# Altium PCB gY-950A20200704V1.PcbDoc (part 1 of 5)
Units mm, origin at the board's own origin, x right, y up, seen from the top; angles counter-clockwise.
Board outline 59.48 x 100.3 mm, 2 copper layers (Top Layer, Bottom Layer), stack 0.193 mm thick; 144 components, 124 nets, 550 pads, 234 vias.
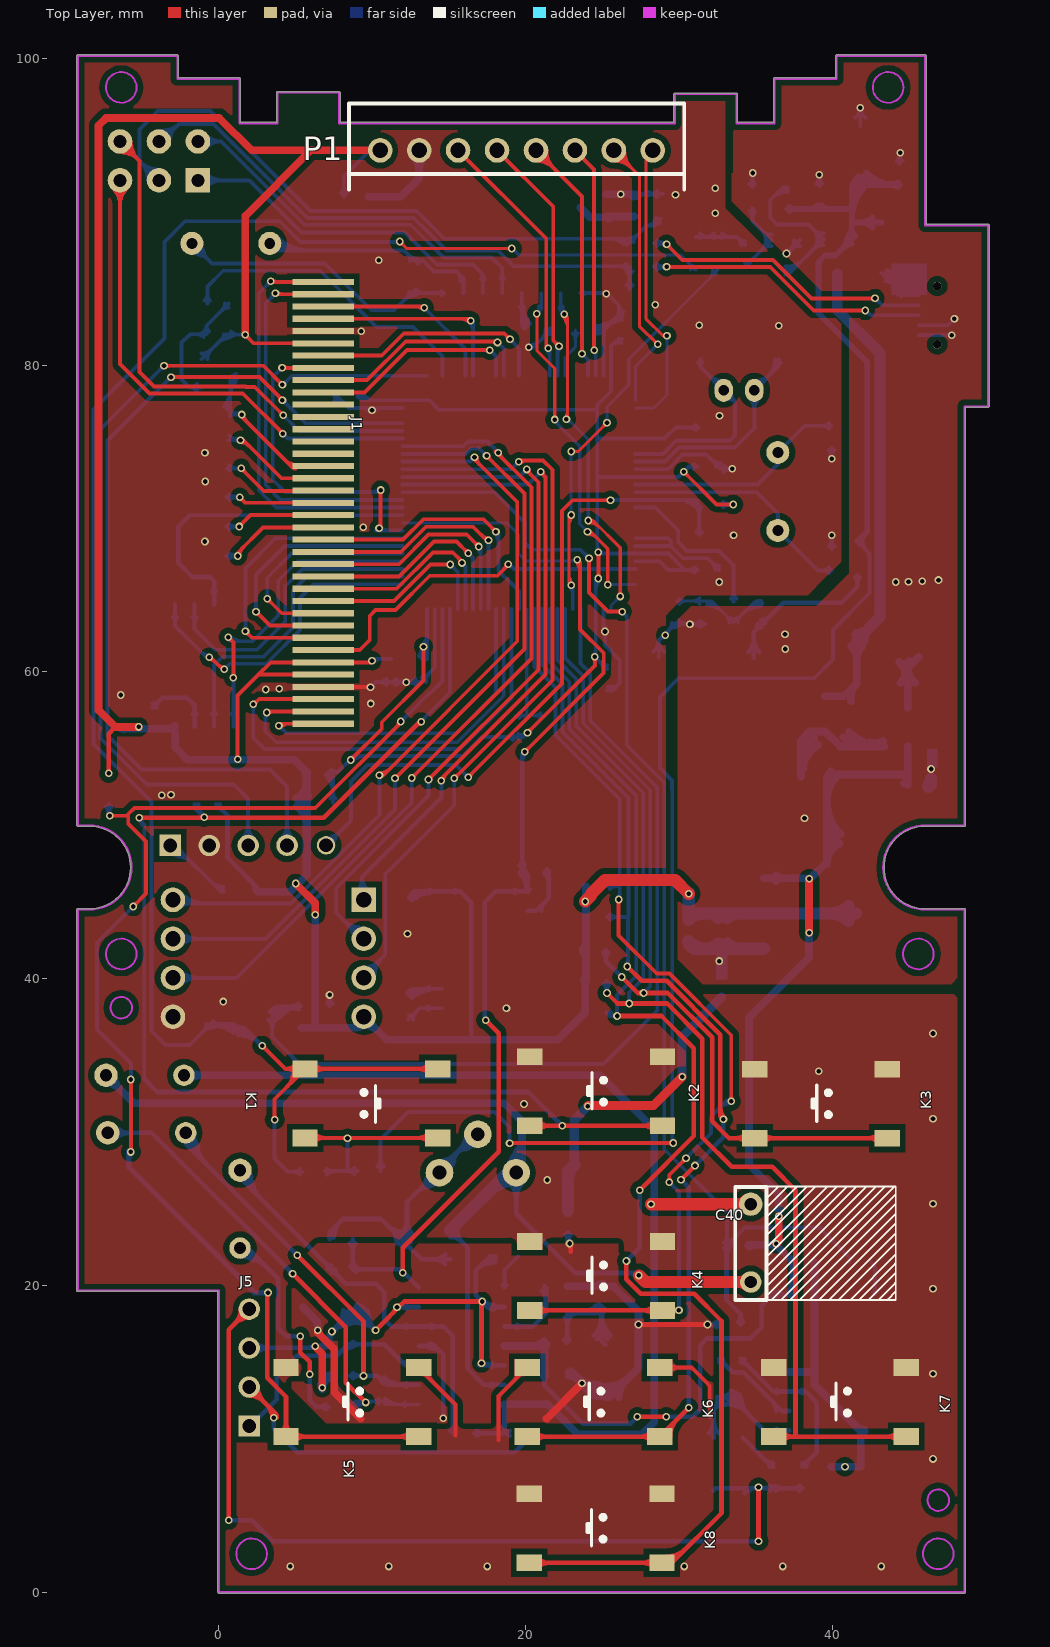
[diagram p0: Top Layer view]
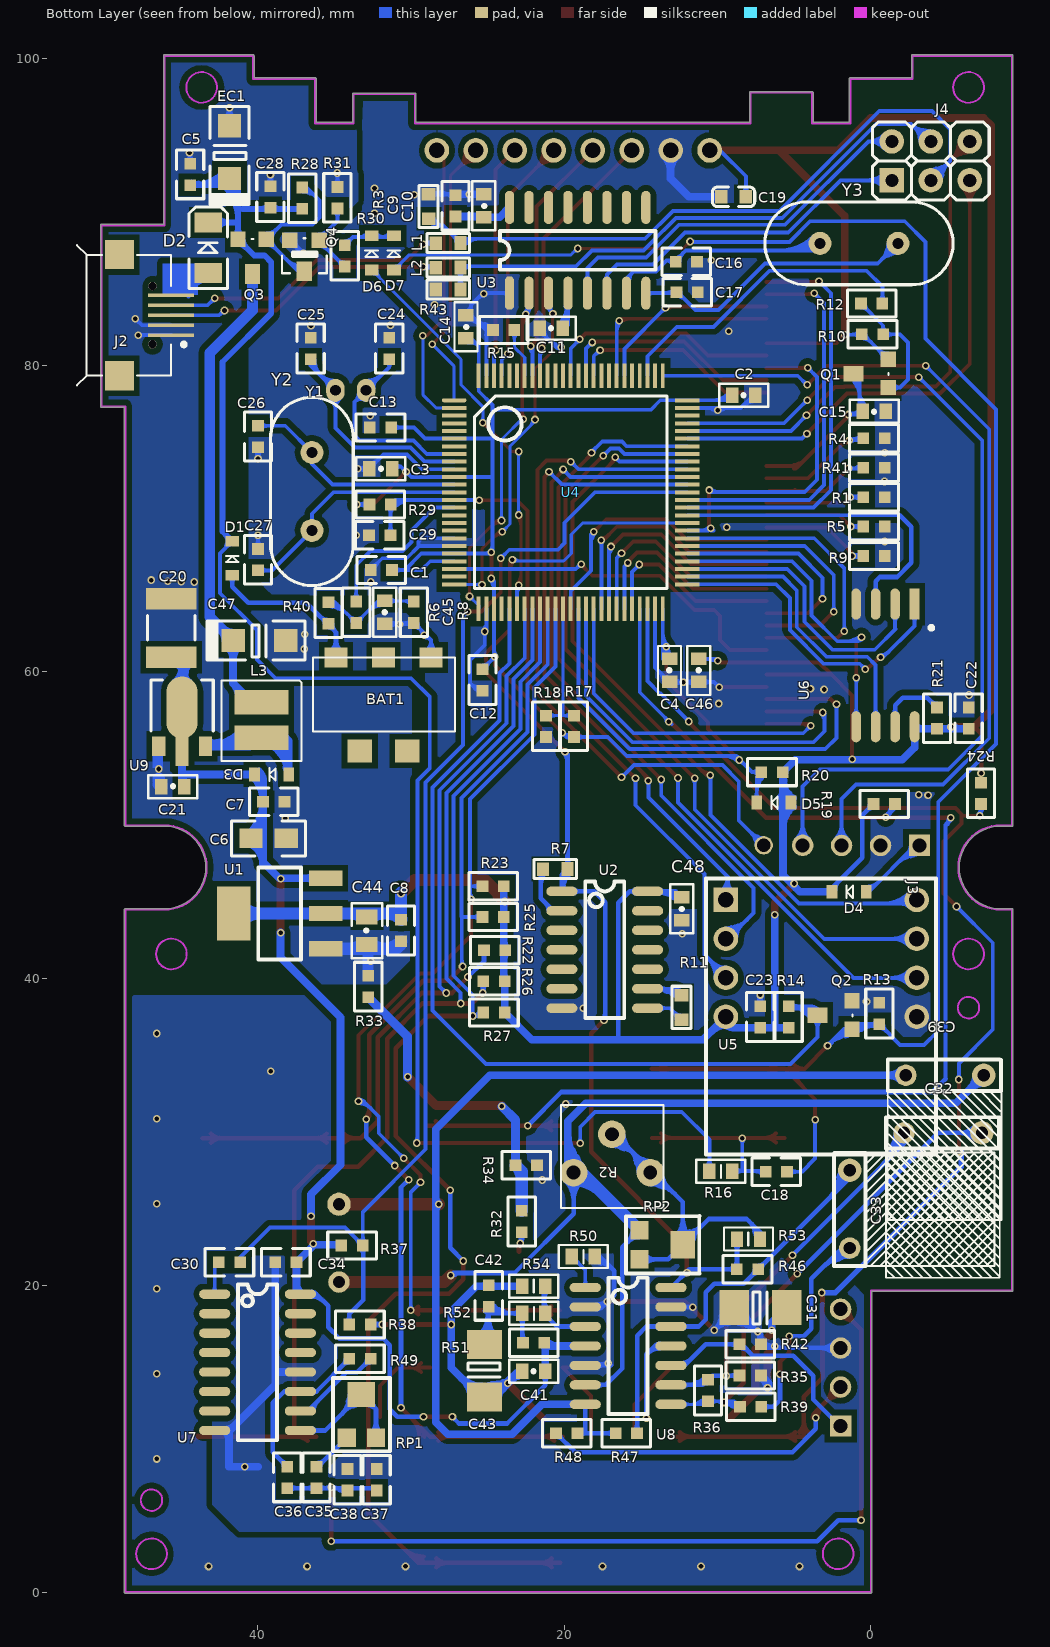
[diagram p1: Bottom Layer view, seen from below]

## Layer stack, top to bottom
Top Layer: signal copper 0.0419
Dielectric: core 0.1092, FR-4, Dk 4.2
Bottom Layer: signal copper 0.0419

## Board outline
-9.264,44.5 cw(c-9.2,44.5) -9.2,44.564 -8.45,44.564 ccw(c-8.45,47.25) -5.764,47.25 ccw(c-8.45,47.25) -8.449,49.936 cw(c-8.45,50) -8.45,49.936 -9.2,49.936 cw(c-9.2,50) -9.264,50 -9.264,100.169 cw(c-9.2,100.169) -9.2,100.233 -2.72,100.233 cw(c-2.72,100.169) -2.656,100.169 -2.656,98.733 1.33,98.733 cw(c1.33,98.669) 1.394,98.669 1.394,95.833 3.766,95.833 3.766,97.77 cw(c3.83,97.77) 3.83,97.834 7.83,97.834 cw(c7.83,97.77) 7.894,97.77 7.894,95.833 29.666,95.833 29.666,97.67 cw(c29.73,97.67) 29.73,97.734 33.73,97.734 cw(c33.73,97.67) 33.794,97.67 33.794,95.833 36.166,95.833 36.166,98.669 cw(c36.23,98.669) 36.23,98.733 40.216,98.733 40.216,100.169 cw(c40.28,100.169) 40.28,100.233 46.05,100.233 cw(c46.05,100.169) 46.114,100.169 46.114,89.184 50.15,89.184 cw(c50.15,89.12) 50.214,89.12 50.214,77.32 cw(c50.15,77.32) 50.15,77.256 48.664,77.256 48.664,50 cw(c48.6,50) 48.6,49.936 46.05,49.936 cw(c46.05,50) 46.049,49.936 cw(c46.05,47.25) 46.05,49.936 46.049,49.936 ccw(c46.05,47.25) 46.05,44.564 48.6,44.564 cw(c48.6,44.5) 48.664,44.5 48.664,0 ccw(c48.6,0) 48.664,0.001 48.664,0 cw(c48.6,0) 48.599,-0.064 0,-0.064 cw(c0,0) -0.064,0 -0.064,19.607 -9.2,19.607 cw(c-9.2,19.671) -9.264,19.671

## Design rules (kind name [scope] priority, off if disabled: settings)
Clearance Clearance_1 [IsRegion] p1: gap=0.381
Clearance [All] p2: gap=0.203
ComponentClearance [All] p1 off: gap=0.254 collisioncheckmode=3 verticalgap=0.254 showdistances=FALSE
HoleSize [All] p1: absolutevalues=TRUE maxlimit=7.62 minlimit=0.025 maxpercent=80.000 minpercent=20.000
HoleToHoleClearance [All] p1 off: gap=0.051 allowstackedmicrovias=TRUE
MinimumSolderMaskSliver [All] p1 off: minsoldermaskwidth=0.025
PolygonConnect [All] p1: connectstyle=Direct reliefconductorwidth=0.254 reliefentries=4 polygonreliefangle="90 Angle"
RoutingVias [All] p1: holewidth=0.508 width=0.762 viastyle="Through Hole" minholewidth=0.381 minwidth=0.508 maxholewidth=0.889 maxwidth=1.27
SilkToSilkClearance [All] p1: silktosilkclearance=0.013
SilkscreenOverComponentPads SilkToSolderMaskClearance [IsPad] p1 off: minsilkscreentomaskgap=0.03
SolderMaskExpansion [All] p1: expansion=0.102
Width [All] p1: maxlimit=7.62 minlimit=0.203 preferedwidth=0.254
22 further rules are at their usual default settings.

## Components (designator, comment, footprint, x,y, rotation, side; value= is the part's Value field where it differs from the comment)
BAT1 "BL-5C" BC-4-3P 36.373,60.935 r180 bottom locked
C1 "100nF" 0603C#1 31.217,66.65 r0 bottom
C2 "100nF" 0603C#2 9.042,78.029 r180 bottom
C3 "100nF" 0603C#2 31.191,73.254 r0 bottom
C4 "100nF" 0603C#2 13.132,60.858 r270 bottom
C5 "100nF" 0603C#1 44.38,91.74 r90 bottom
C6 "106" 0805C#1 38.125,49.149 r0 bottom
C7 "104" 0603C#1 38.227,51.537 r0 bottom
C8 "104" 0603C#1 30.632,42.443 r90 bottom
C9 "106" 0603C#1 27.076,89.687 r90 bottom
C10 "104" 0603C#2 25.222,89.637 r90 bottom
C11 "104" 0603C#2 21.59,82.398 r180 bottom
C12 "100nF" 0603C#1 25.324,60.173 r270 bottom
C13 "100nF" 0603C#1 31.274,75.941 r0 bottom
C14 "100nF" 0603C#2 26.391,81.737 r90 bottom
C15 "100nF" 0603C#2 0.54,76.983 r180 bottom
C16 "22PF" 0603C#1 12.675,84.76 r180 bottom
C17 "22PF" 0603C#1 11.328,86.741 r0 bottom
C18 "100nF" 0603C#1 6.858,27.407 r180 bottom
C19 "104" C_0603 8.947,90.978 r0 bottom
C20 "107/16V" 1812 45.898,62.916 r90 bottom
C21 "100nF" 0603C#2 44.755,52.527 r0 bottom
C22 "100nF" 0603C#1 -6.375,57.683 r270 bottom
C23 "104" 0603C#1 7.214,38.202 r270 bottom
C24 "13pF" 0603C#1 31.394,81.788 r270 bottom (schematic designator C45)
C25 "13pF" 0603C#1 36.525,81.788 r270 bottom
C26 "13pF" 0603C#1 39.952,74.651 r90 bottom
C27 "13pF" 0603C#1 39.954,68.021 r270 bottom
C28 "100nF" 0603C#1 39.148,91.664 r270 bottom
C29 "100nF" 0603C#1 32.715,68.91 r180 bottom
C30 "474pF" 0603C#1 41.123,21.514 r0 bottom
C31 "106/16V" 3528B 7.061,18.644 r90 bottom
C32 "683" CBB_5*5 -4.724,29.896 r90 bottom locked
C33 "224" CBB_5*5 1.321,24.994 r0 bottom locked
C34 "100nF" 0603C#1 37.44,21.514 r0 bottom
C35 "1nF" 0603C#1 36.144,6.782 r90 bottom
C36 "2.7pF" 0603C#1 38.043,6.782 r90 bottom
C37 "13pF" 0603C#1 32.22,6.629 r90 bottom
C38 "82pF" 0603C#1 34.119,6.629 r90 bottom
C39 "334" CBB_5*5 -4.844,33.65 r90 bottom locked
C40 "272" CBB_5*5 34.729,22.779 r180 top locked
C41 "100nF" 0603C#2 22.733,14.402 r180 bottom
C42 "100nF" 0603C#1 24.917,20.015 r270 bottom
C43 "47uF/16v" 3528B 25.095,14.3 r180 bottom
C44 "106" 0805C#2 32.842,42.215 r90 bottom
C45 "100nF" 0603C#2 31.699,64.643 r270 bottom
C46 "100nF" 0603C#2 11.227,60.858 r270 bottom
C47 "106/16V" 1206C-T 41.58,62.052 r180 bottom
C48 "104" 0603C#2 12.319,43.79 r90 bottom
D1 "B5819WS" SOD-323_B5819WS 41.631,67.412 r90 bottom
D2 "IN4148" DIODE0 43.205,86.004 r90 bottom
D3 "SS14" SOD-323_B5819WS 39.065,53.315 r0 bottom
D4 "B5819ws" SOD-323_B5819WS 1.42,45.669 r0 bottom
D5 "B5819WS" SOD-323_B5819WS 6.325,51.486 r0 bottom
D6 "B5819ws" SOD-323_B5819WS 32.544,87.32 r90 bottom
D7 "B5819ws" SOD-323_B5819WS 31.096,87.32 r90 bottom
EC1 "10uF/10V" 1206C-T 41.815,92.172 r90 bottom
J1 "TFT2.4_37P-0.8MM" TFT2.4_37P-0.8 6.807,74.625 r0 top locked
J2 "Micro USB" Micro_USB 51.137,83.256 r0 bottom locked
J3 "DEBUG" HEADER5-2.54 1.905,48.692 r0 bottom
J4 "CONT3*2" SIP3*2_2MM54 -1.372,92.05 r90 bottom locked
J5 "sensor" HEADER4-2.54 3.404,18.161 r90 top
K1 "BUTTON" key_6*6*5mm 9.939,31.872 r270 top locked
K2 "BUTTON" key_6*6*5mm 24.595,32.66 r90 top locked
K3 "BUTTON" key_6*6*5mm 39.251,31.847 r90 top locked
K4 "BUTTON" key_6*6*5mm 24.595,20.62 r90 top locked
K5 "BUTTON" key_6*6*5mm 8.694,12.393 r90 top locked
K6 "BUTTON" key_6*6*5mm 24.417,12.393 r90 top locked
K7 "BUTTON" key_6*6*5mm 40.495,12.393 r90 top locked
K8 "BUTTON" key_6*6*5mm 24.562,4.166 r90 top locked
L1 "10R" R_0603 27.559,87.96 r0 bottom
L2 "10R" R_0603 27.559,86.36 r0 bottom
L3 "10uH" "CD32 - duplicate" 39.726,58.014 r270 bottom
P1 "Header 8" 2.54-8PH 10.516,94.005 r0 top locked
Q1 "AO3401" SOT-23_A03401A_PMOS -0.629,79.142 r0 bottom
Q2 "9013" SOT-23_S9013_J3_NPN 2.108,37.694 r0 bottom
Q3 "AO3401" SOT-23_A03401A_PMOS 40.011,87.701 r270 bottom
Q4 "9013" SOT-23 37.877,88.151 r180 bottom
R1 "1.5K" 0603R#1 -0.908,71.395 r0 bottom
R2 "RP2" R_SW 19.38,27.356 r180 bottom
R3 "NC300k" R_0603 28.829,90.348 r270 bottom
R4 "1.5K" 0603R#1 -0.908,75.23 r0 bottom
R5 "1.5K" 0603R#1 -0.908,69.477 r0 bottom
R6 "1K" 0603R#1 33.553,64.592 r270 bottom
R7 "0R" R_0603 20.574,47.142 r0 bottom
R8 "1M" 0603R#1 29.794,63.195 r90 bottom
R9 "oR" 0603R#1 -0.908,67.559 r0 bottom
R10 "100K" 0603R#1 0.591,82.012 r180 bottom
R11 "0R" R_0603 12.344,38.125 r90 bottom
R12 "1K" 0603R#1 -0.756,84.018 r0 bottom
R13 "100k" 0603R#1 -0.559,38.43 r270 bottom
R14 "300k" 0603R#1 5.359,36.805 r90 bottom
R15 "100K" 0603R#1 23.241,82.296 r0 bottom
R16 "20k" 0603R#2 9.017,27.457 r0 bottom
R17 "100K" 0603R#1 19.355,55.753 r90 bottom
R18 "100K" 0603R#1 21.184,55.753 r90 bottom
R19 "100k" 0603R#1 -0.178,51.384 r180 bottom
R20 "0R" 0603R#1 5.74,53.467 r0 bottom
R21 "10K" 0603R#1 -4.318,57.683 r270 bottom
R22 "100k" 0603R#1 23.825,41.859 r0 bottom
R23 "100k" 0603R#1 23.927,46.025 r0 bottom
R24 "100k" 0603R#1 -7.188,52.781 r270 bottom
R25 "100k" 0603R#1 23.927,44.018 r0 bottom
R26 "100k" 0603R#1 23.876,39.827 r0 bottom
R27 "100K" 0603R#1 23.876,37.795 r0 bottom
R28 "300K" 0603R#1 37.065,91.588 r270 bottom
R29 "10K" 0603R#1 31.293,70.917 r0 bottom
R30 "10K" 0603R#1 34.296,86.431 r90 bottom
R31 "300K" 0603R#1 34.779,91.613 r270 bottom
R32 "0R" 0603R#1 22.758,23.47 r90 bottom
R33 "0R" 0603R#1 32.766,38.786 r90 bottom
R34 "0R" 0603R#1 21.768,27.838 r0 bottom
R35 "680R 1%" 0603R#1 8.56,14.122 r180 bottom
R36 "120K 1%" 0603R#1 10.617,12.446 r90 bottom
R37 "360k" 0603R#1 33.122,22.606 r0 bottom
R38 "180K" 0603R#1 34.011,17.45 r180 bottom
R39 "47K 1%" 0603R#1 7.137,12.09 r0 bottom
R40 "1M" 0603R#1 35.357,64.541 r270 bottom
R41 "1.5K" 0603R#1 -0.908,73.312 r0 bottom
R42 "180K 1%" 0603R#1 8.56,16.154 r180 bottom
R43 "NC300K" R_0603 27.559,84.938 r0 bottom
R46 "180K 1%" 0603R#1 7.341,21.057 r0 bottom
R47 "120K 1%" 0603R#1 16.637,10.363 r180 bottom
R48 "390R 1%" 0603R#1 20.523,10.363 r180 bottom
R49 "1M 1%" 0603R#1 32.614,15.215 r0 bottom
R50 "100R 1%" 0603R#2 17.983,21.895 r0 bottom
R51 "100R 1%" 0603R#1 21.285,16.256 r0 bottom
R52 "30K 1%" 0603R#2 21.209,18.186 r0 bottom
R53 "10K 1%" 0603R#2 8.738,23.012 r180 bottom
R54 "20K 1%" 0603R#2 22.733,19.939 r180 bottom
RP1 "30K" RP3*3 33.274,12.852 r270 bottom
RP2 "20k" RP3*3 12.294,22.708 r0 bottom
U1 "AMS1117-3.3V" SOT_223 38.542,44.25 r180 bottom
U2 "74HC14D" TLC27M91 17.348,41.883 r180 bottom
U3 "CH340G" SO-16 23.546,84.684 r90 bottom
U4 "STM32F103VCT6" LQFP100 28.169,79.35 r270 bottom locked
U5 "SNR012V" SNR012V 9.449,45.136 r180 bottom locked
U6 "W25Q64" 24LC512 -1.219,60.325 r90 bottom
U7 "74HC4060D" 74HC4060D 38.075,14.749 r180 bottom
U8 "TLC27M91" TLC27M91 15.824,16.053 r180 bottom
U9 "MC2688-5V" SOT-89 46.431,55.143 r180 bottom
Y1 "32.768KHz" 32768 33.909,78.359 r270 bottom
Y2 "12M" XTAL 36.449,69.24 r270 bottom
Y3 "12M" XTAL -1.753,87.935 r180 bottom

## Footprints (in the part's own frame and the unit in brackets; to place one, negate y for a bottom-side part, rotate by r counter-clockwise, add the part's x,y. Pads: shape width x height; smd on the part's side, far side on the other; paste and mask are expansions set on the pad)
2.54-8PH [mm]
  round 1.6 hole 1: 1(-0.004,-0.001) 2(2.536,-0.001) 3(5.076,-0.001) 4(7.616,-0.001) 5(10.156,-0.001) 6(12.696,-0.001) 7(15.236,-0.001) 8(17.776,-0.001)
  silkscreen extent -2.03,-2.55 19.82,3.06
24LC512 [mil]
  rect 80x25 smd: 1(161.35,-64.4)
  oval 80x25 smd: 2(161.35,-14.4) 3(161.35,35.6) 4(161.35,85.6) 5(-153.62,85.6) 6(-153.61,35.6) 7(-153.62,-14.4) 8(-153.62,-64.4)
  silkscreen extent 96,-112 105,-102
74HC4060D [mil]
  oval 80x24 smd: 1(-185.28,184.33) 2(-185.28,134.33) 3(-185.28,84.33) 4(-185.28,34.33) 5(-185.28,-15.67) 6(-185.28,-65.67) 7(-185.28,-115.67) 8(-185.28,-165.67) 9(34.72,-165.67) 10(34.72,-115.67) 11(34.72,-65.67) 12(34.72,-15.67) 13(34.72,34.33) 14(34.72,84.33) 15(34.72,134.33) 16(34.72,184.33)
  silkscreen extent -125,-191 -25,209
0603C#1 [mil]
  rect 30x30 smd: 1(0.04,0.04) 2(55.04,0.04)
  silkscreen extent -35,-35 90,35
0603C#2 [mil]
  rect 32x40 smd: 1(0.5,0.34) 2(59.5,0.34)
  silkscreen extent -33,-29 93,30
0603R#1 [mil]
  rect 30x30 smd: 1(0,0) 2(55,0)
  silkscreen extent -35,-35 90,35
0603R#2 [mil]
  rect 32x40 smd: 1(0.5,0.34) 2(59.5,0.34)
  silkscreen extent -33,-29 93,30
0805C#1 [mil]
  rect 60x50 smd: 1(0,-0.04) 2(90,-0.04)
  silkscreen extent -50,-45 140,45
0805C#2 [mil]
  rect 39.37x55.12 smd: 1(0.38,0.46) 2(71.24,0.46)
  silkscreen extent -35,-39 107,40
1206C-T [mil]
  rect 60x60 smd: 1(-0.04,-0.04) 2(134.96,-0.04)
  silkscreen extent -67,-50 185,50
1812 [mm]
  rect 1.4x3.3 smd: 1(-1.948,-0.282) 2(1.852,-0.282)
  silkscreen extent -0.85,-1.83 0.75,1.27, body extent -2.45,-1.98 2.35,1.42, height 1.4
3528B [mm]
  rect 2.28x1.9 smd: 1(-0.082,1.839) 2(-0.082,-1.581)
  silkscreen extent -1.16,-0.28 0.93,0.63
32768 [mm]
  rect 6x2 on Bottom Overlay: 0(-4.5,0)
  oval 1.5x1.2 hole 0.7: 1(0,1) 2(0,-1)
BC-4-3P [mm] "H=7.7"
  rect 1.6x1.5 smd: 0(3.05,-6.1) 0(6.15,-6.1)
  rect 1.5x1.3 smd: 0(4.6,0) 1(1.5,0) 2(7.7,0)
  silkscreen extent 0,-4.83 9.27,0
C_0603 [mm]
  rect 0.8x0.9 smd: 1(-0.8,0) 2(0.8,0)
  silkscreen extent -1.38,-0.64 1.38,0.64, body extent -0.85,-0.39 0.75,0.41, height 0.8
CBB_5*5 [mm]
  round 1.524 hole 0.8: 1(0.052,-2.52)
  round 1.4 hole 0.8: 2(0.052,2.56)
  silkscreen extent -9.4,-3.68 1.07,3.75
"CD32 - duplicate" [mm]
  rect 1.6x3.5 smd: 1(0,0) 2(2.3,0)
  silkscreen extent -1.41,-2.62 3.83,2.6
DIODE0 [mm]
  rect 1.3x1.8 smd: A(0,0) K(3.3,0)
  silkscreen extent -1.01,-1.26 4.3,1.25
HEADER4-2.54 [mm]
  rect 1.4x1.4 hole 0.9: 1(-7.328,1.433)
  round 1.4 hole 0.9: 2(-4.788,1.433) 3(-2.248,1.433) 4(0.292,1.429)
HEADER5-2.54 [mm]
  rect 1.4x1.4 hole 0.9: 1(-5.08,0.004)
  round 1.4 hole 0.9: 2(-2.54,0.004) 3(0,0.004) 4(2.54,0)
  round 1.2 hole 0.9: 5(5.08,-0.004)
key_6*6*5mm [mm]
  rect 1.1x1.65 smd: 1(-2.25,4.325) 2(-2.25,-4.325) 3(2.25,-4.325) 4(2.25,4.325)
  silkscreen extent -1.15,-0.62 1.23,0.57
LQFP100 [mm]
  oval 0.26x1.6 smd: 1(1.637,1.002)
  rect 0.26x1.6 smd: 2(2.137,1.002) 3(2.637,1.002) 4(3.137,1.002) 5(3.637,1.002) 6(4.137,1.002) 7(4.637,1.002) 8(5.137,1.002) 9(5.637,1.002) 10(6.137,1.002) 11(6.637,1.002) 12(7.137,1.002) 13(7.637,1.002) 14(8.137,1.002) 15(8.637,1.002) 16(9.137,1.002) 17(9.637,1.002) 18(10.137,1.002) 19(10.637,1.002) 20(11.137,1.002) 21(11.637,1.002) 22(12.137,1.002) 23(12.637,1.002) 24(13.137,1.002) 25(13.637,1.002) 51(13.637,16.202) 52(13.137,16.202) 53(12.637,16.202) 54(12.137,16.202) 55(11.637,16.202) 56(11.137,16.202) 57(10.637,16.202) 58(10.137,16.202) 59(9.637,16.202) 60(9.137,16.202) 61(8.637,16.202) 62(8.137,16.202) 63(7.637,16.202) 64(7.137,16.202) 65(6.637,16.202) 66(6.137,16.202) 67(5.637,16.202) 68(5.137,16.202) 69(4.637,16.202) 70(4.137,16.202) 71(3.637,16.202) 72(3.137,16.202) 73(2.637,16.202) 74(2.137,16.202) 75(1.637,16.202)
  rect 1.6x0.26 smd: 26(15.237,2.602) 27(15.237,3.102) 28(15.237,3.602) 29(15.237,4.102) 30(15.237,4.602) 31(15.237,5.102) 32(15.237,5.602) 33(15.237,6.102) 34(15.237,6.602) 35(15.237,7.102) 36(15.237,7.602) 37(15.237,8.102) 38(15.237,8.602) 39(15.237,9.102) 40(15.237,9.602) 41(15.237,10.102) 42(15.237,10.602) 43(15.237,11.102) 44(15.237,11.602) 45(15.237,12.102) 46(15.237,12.602) 47(15.237,13.102) 48(15.237,13.602) 49(15.237,14.102) 50(15.237,14.602) 76(0.037,14.602) 77(0.037,14.102) 78(0.037,13.602) 79(0.037,13.102) 80(0.037,12.602) 81(0.037,12.102) 82(0.037,11.602) 83(0.037,11.102) 84(0.037,10.602) 85(0.037,10.102) 86(0.037,9.602) 87(0.037,9.102) 88(0.037,8.602) 89(0.037,8.102) 90(0.037,7.602) 91(0.037,7.102) 92(0.037,6.602) 93(0.037,6.102) 94(0.037,5.602) 95(0.037,5.102) 96(0.037,4.602) 97(0.037,4.102) 98(0.037,3.602) 99(0.037,3.102) 100(0.037,2.602)
  silkscreen extent 1.37,2.34 13.9,14.87
Micro_USB [mm] "5P ÌùÆ¬ ´"
  rect 3x0.25 smd: 1(-5.508,1.3) 2(-5.508,0.65) 3(-5.508,0) 4(-5.508,-0.65) 5(-5.508,-1.3)
  round 0.55 hole 0.55 unplated: MH1(-4.3,1.9) MH2(-4.3,-1.9)
  rect 1.9x1.9 smd: ""(-2.15,-3.95) ""(-2.15,3.95)
  silkscreen extent -6.47,-4.57 0.63,4.57
R_0603 [mm]
  rect 0.8x0.9 smd: 1(-0.8,-0.006) 2(0.8,0.006)
  silkscreen extent -1.38,-0.62 1.38,0.61, body extent -0.76,-0.38 0.84,0.42, height 0.45
R_SW [mm]
  round 1.8 hole 0.9: 1(0,0) 2(5,0) 3(2.5,2.5)
  silkscreen extent -0.83,-2.3 5.87,4.4
RP3*3 [mm]
  rect 1.2x1.2 smd: 1(2.791,-0.893) 2(2.791,1.012)
  rect 1.6x1.8 smd: 3(-0.035,0.056)
  silkscreen extent -1.11,-1.81 3.67,1.92
SIP3*2_2MM54 [mm]
  rect 1.6x1.6 hole 0.85: 1(0,0)
  round 1.6 hole 0.85: 2(2.54,0) 3(0,-2.54) 4(2.54,-2.54) 5(0,-5.08) 6(2.54,-5.08)
  silkscreen extent -1.27,-6.35 3.81,1.27, body extent -1.27,-6.35 3.81,1.28, height 8.54
SNR012V [mm]
  rect 1.6x1.6 hole 1: 1(0,0)
  round 1.6 hole 1: 2(0,-2.54) 3(0,-5.08) 4(0,-7.62) 5(12.446,-7.62) 6(12.446,-5.08) 7(12.446,-2.54) 8(12.446,0)
  silkscreen extent -1.31,-16.6 13.69,1.4
SO-16 [mil]
  oct 85x24 smd: 1(0.5,0.34)
  oval 85x24 smd: 2(0.5,-49.66) 3(0.5,-99.66) 4(0.5,-149.66) 5(0.5,-199.66) 6(0.5,-249.66) 7(0.5,-299.66) 8(0.5,-349.66) 9(220.5,-349.66) 10(220.5,-299.66) 11(220.5,-249.66) 12(220.5,-199.66) 13(220.5,-149.66) 14(220.5,-99.66) 15(220.5,-49.66) 16(220.5,0.34)
  silkscreen extent 60,-375 160,25, body extent -46,-377 266,25, height 71
SOD-323_B5819WS [mm]
  rect 0.7x0.9 smd: 1(-1.115,0) 2(1.115,0)
  silkscreen extent -0.25,-0.41 0.15,0.43
SOT-23 [mm]
  rect 1x1 smd: B(1.905,0) E(0,0)
  rect 1x1.27 smd: C(0.94,-2.032)
  silkscreen extent -0.51,-2.16 2.41,0.13, body extent -0.54,-2.57 2.46,0.43, height 1.3
SOT-23_A03401A_PMOS [mm]
  rect 1.3x1 smd: D(1.75,-0.304)
  rect 1x1 smd: G(-0.5,0.6) S(-0.5,-1.244)
  silkscreen extent -0.53,-0.35 -0.53,-0.23
SOT-23_S9013_J3_NPN [mm]
  rect 1x1 smd: B(-0.881,0.981) E(-0.881,-0.863)
  rect 1.3x1 smd: C(1.369,0.077)
  silkscreen extent -0.91,0.03 -0.91,0.15
SOT-89 [mil]
  rect 34x50 smd: 1(0,0) 3(120,0)
  rect 34x100 smd: 2(60,0)
  oval 79.65x160 smd: 2(60,100)
  silkscreen extent -20,40 140,170
SOT_223 [mm]
  rect 2.2x1 smd: 1(3,-2.3) 2(3,0) 3(3,2.3)
  rect 2.2x3.5 smd: 2(-3,0)
  silkscreen extent -1.4,-3 1.4,3, body extent -3.49,-3.25 3.47,3.25, height 1.7
TFT2.4_37P-0.8 [mm]
  rect 4x0.4 smd: 1(0,10.8) 2(0,10) 3(0,9.2) 4(0,8.4) 5(0,7.6) 6(0,6.8) 7(0,6) 8(0,5.2) 9(0,4.4) 10(0,3.6) 11(0,2.8) 12(0,2) 13(0,1.2) 14(0,0.4) 15(0,-0.4) 16(0,-1.2) 17(0,-2) 18(0,-2.8) 19(0,-3.6) 20(0,-4.4) 21(0,-5.2) 22(0,-6) 23(0,-6.8) 24(0,-7.6) 25(0,-8.4) 26(0,-9.2) 27(0,-10) 28(0,-10.8) 29(0,-11.6) 30(0,-12.4) 31(0,-13.2) 32(0,-14) 33(0,-14.8) 34(0,-15.6) 35(0,-16.4) 36(0,-17.2) 37(0,-18)
TLC27M91 [mil]
  oval 80x24 smd: 1(-110,150) 2(-110,100) 3(-110,50) 4(-110,0) 5(-110,-50) 6(-110,-100) 7(-110,-150) 8(110,-150) 9(110,-100) 10(110,-50) 11(110,0) 12(110,50) 13(110,100) 14(110,150)
  silkscreen extent -50,-175 50,175
XTAL [mm]
  round 1.5 hole 0.711: 1(0.013,0.009) 2(-5.067,0.009)
  round 1.8 on Bottom Overlay: 1(0.013,0.009) 2(-5.067,0.009)
  round 1.8 on Top Solder: 1(0.013,0.009) 2(-5.067,0.009)
  round 0.889 on Bottom Solder: 175(0.013,0.009) 176(-5.067,0.009)
  silkscreen extent -8.66,-2.69 3.61,2.71

## Part data
BAT1: library part "Plug AC Female", "IEC Mains Power Outlet, EN60 320-2-2 F Class I, PC Flange Rear Mount, Chassis Socket"
C1 C2 C3 C4 C5 C12 C13 C14 C15 C18 C22 C24 C25 C26 C27 C28 C29 C30 C32 C33 C34 C35 C36 C37 C38 C39 C40 C41 C42 C45 C46: library part CAP, "Capacitor"
C6 C7 C8 C9 C10 C11 C16 C17 C23 C44 C48: library part CAP3
C19: library part CAP
C20 C21: library part CAP-TYPE1
C31 C43 C47: library part ELECTRO1, "Electrolytic Capacitor"
D1 D2 D4 D5: library part DIODE, "Diode"
D3 D6 D7: library part "Diode 11DQ03", "Schottky Rectifier"
EC1: library part ECAP, "Bi-Polar Capacitor"
J1: library part TFT2.4-37PIN
J2: library part USB_AB
J3: library part CON5, "Connector"
J4: library part CONT3
J5: library part "Header 4", "Header, 4-Pin"
K1 K2 K3 K4 K5 K6 K7 K8: library part BUTTON-TYPE1
L1 L2 R3 R7 R11 R43: library part RES
L3: library part "Inductor Iron", "Magnetic-Core Inductor"
Q1 Q3: library part P_MOS1
Q2: library part 2N3904, "NPN General Purpose Amplifier"
Q4: library part NPN, "NPN Transistor"
R1 R4 R5 R6 R8 R9 R10 R12 R13 R14 R16 R17 R19 R20 R21 R22 R23 R24 R25 R26 R27 R28 R29 R30 R31 R32 R33 R34 R35 R36 R37 R38 R39 R40 R41 R42 R46 R47 R48 R49 R50 R51 R52 R53 R54: library part RES, "Resistor"
R2: library part "RES B3"
R15 R18: library part RES2
RP1 RP2: library part POT2, "Potentiometer"
U1: library part AMS11
U2: "74HC14D SOP14"
U4: library part STM32F103VBT6, "STM32F103ZET6"
U7: library part Component_2
U8: library part TCL27M91
U9: library part MCC6288
Y1: library part CRYSTAL, "Crystal"
Y2 Y3: library part XTAL, "晶?"

## Via types
v1: diameter 0.5, hole 0.3, Top Layer to Bottom Layer, tented both sides, 234 vias

## Nets (pads, with @x,y where several pads share a name; then routed paths per layer and width w, separated by ;. In a path a pad name is that pad's centre, name@x,y a point inside that pad or via, vN(x,y) a via of type N, cw(c..) or ccw(c..) an arc to the next point about the centre after c; other vN are vias at no path point)
AD0: P1.7 U4.1 | length 22.6
  Top Layer w0.203: P1.7@25.752,93.306 cw(c25.752,91.62) 26.944,92.812 cw(c28.136,94.004) P1.7@26.45,94.004 ; P1.7@25.752,93.509 cw(c25.752,92.314) 26.597,93.159 cw(c27.442,94.004) P1.7@26.247,94.004 ; P1.7@25.752,94.004 27.411,92.345 27.411,82.546 v1(28.6,81.356)
  Bottom Layer w0.203: U4.1@27.166,77.712 27.166,79.922 v1(28.6,81.356)
AUXCL: P1.6 U4.98 | length 15.3
  Top Layer w0.25: P1.6@23.212,94.004 24.46,92.756 v1(24.46,80.975)
  Bottom Layer w0.25: v1(24.46,80.975) 24.566,80.869 U4.98@24.566,79.312
AUXDA: P1.5 U4.97 | length 20.7
  Top Layer w0.25: P1.5@20.672,93.329 cw(c20.672,91.7) 21.824,92.852 cw(c22.976,94.004) P1.5@21.347,94.004 ; P1.5@20.672,93.579 cw(c20.672,92.553) 21.397,93.279 cw(c22.123,94.004) P1.5@21.097,94.004 ; P1.5@20.672,94.004 23.673,91.003 v1(23.673,80.747)
  Bottom Layer w0.25: v1@23.673,80.622 cw(c23.673,80.32) 23.886,80.533 cw(c24.1,80.747) v1@23.798,80.747 ; v1(23.673,80.747) 24.066,80.353 U4.97@24.066,79.312
BATV_CHK: R6.1 U4.15 | length 12.7
  Bottom Layer w0.25: U4.15@27.166,70.712 28.451,70.712 29.943,69.22 29.943,68.478 30.527,67.894 32.614,67.894 33.553,66.954 R6.1@33.553,64.592 ; 33.553,65.21 cw(c32.935,65.21) 33.372,64.773 ccw(c32.935,65.21) 33.553,65.21 ; 33.553,65.21 ccw(c34.171,65.21) 33.734,64.773 cw(c34.171,65.21) 33.553,65.21
BLACK: C31.1 C34.2 C37.2 C38.2 J5.3 R35.2 R42.2 R50.1 U7.8 U7.12 U8.2 U8.5 U8.13 | length 124.9
  Top Layer w0.3: v1(10.211,17.069) 12.09,18.948 v1(17.17,18.948) 17.12,18.898 v1(17.12,14.935) ; 11.365,18.223 ccw(c11.021,18.567) 11.508,18.567 cw(c11.021,18.567) 11.365,18.223 ; v1@11.608,18.667 ccw(c11.608,19.154) 11.952,18.81 cw(c11.608,19.154) v1@11.608,18.667 ; 17.12,18.584 cw(c17.534,18.584) 17.241,18.878 ccw(c17.534,18.584) 17.12,18.584
  Top Layer w0.508: v1(6.274,16.027) 6.274,16.002 6.731,15.545 v1(6.731,13.335)
  Bottom Layer w0.3: J5.3@2.281,15.923 6.932,15.923 R42.2@7.163,16.154 7.163,16.824 C31.1@8.901,18.562 8.901,18.379 v1(10.211,17.069) ; 5.984,15.972 cw(c6.082,15.802) v1@6.209,15.951 ; v1@6.327,16.112 ccw(c6.531,16.441) 6.632,16.067 ; v1@6.339,15.951 cw(c6.466,15.802) 6.564,15.972 ; v1@6.507,16.034 cw(c6.723,15.661) R42.2@7.009,15.982 ; R42.2@7.047,16.354 ccw(c6.815,16.756) 7.263,16.636 ; 7.223,16.551 ccw(c6.77,16.812) v1@7.27,16.964 ; 7.276,16.682 ccw(c7.72,16.563) R42.2@7.349,16.291 ; 7.899,17.619 cw(c9.02,17.318) C31.1@8.889,18.471 ; 7.951,17.318 ccw(c7.566,18.756) C31.1@8.997,18.344 ; C31.1@8.464,17.455 ccw(c8.161,18.585) C31.1@9.285,18.262 ; C31.1@8.517,18.258 ccw(c9.603,18.58) C31.1@9.35,17.476 ; C31.1@8.805,18.344 ccw(c10.169,18.748) 9.851,17.361 ; C31.1@8.926,18.469 cw(c8.571,17.134) 9.914,17.455 ; C31.1@9.004,18.759 cw(c8.718,17.686) C31.1@9.797,17.944 ; v1(11.608,18.567) 11.633,18.593 U8.13@13.03,18.593 ; v1@16.942,14.783 v1@17.272,14.783 ; v1(17.12,14.935) v1@17.272,14.783 ; v1@17.165,14.846 cw(c17.315,14.546) 17.484,14.837 ; v1@17.236,18.927 cw(c17.007,18.073) U8.2@17.773,18.515 ; 17.417,18.823 ccw(c17.272,18.57) v1@17.196,18.852 ; 17.427,14.864 ccw(c17.564,15.377) U8.5@17.83,14.917 ; 17.584,21.418 ccw(c17.392,22.133) R50.1@18.034,21.763 ; R50.1@17.996,21.886 17.67,21.886 16.739,20.955 16.739,19.355 17.501,18.593 U8.2@18.618,18.593 ; U8.5@18.618,14.783 v1@17.272,14.783 ; v1@6.324,16.114 ccw(c6.516,16.447) 6.615,16.076 ; v1@6.324,16.114 ccw(c6.516,16.447) 6.615,16.076 ; v1@6.324,16.114 ccw(c6.516,16.447) 6.615,16.076 ; R42.2@6.999,16.318 cw(c6.047,17.27) 6.047,15.923 ccw(c6.047,17.27) R42.2@6.999,16.318 ; R42.2@6.999,16.318 ccw(c6.605,16.712) 7.163,16.712 ; R42.2@6.999,16.318 ccw(c6.605,16.712) 7.163,16.712 ; 7.163,16.712 ccw(c7.72,16.712) 7.326,16.318 cw(c7.72,16.712) 7.163,16.712 ; v1@7.392,17.089 ccw(c7.478,17.411) 7.644,17.122 ; v1@7.392,17.089 ccw(c7.478,17.411) 7.644,17.122 ; v1@7.392,17.089 ccw(c7.478,17.411) 7.644,17.122 ; v1@10.211,17.069 cw(c11.444,18.303) 9.7,18.35 ccw(c11.444,18.303) v1@10.211,17.069 ; v1@10.211,17.069 ccw(c8.992,15.85) 8.93,17.573 cw(c8.992,15.85) v1@10.211,17.069 ; 11.945,18.593 cw(c11.945,18.219) 12.21,18.483 ccw(c11.945,18.219) 11.945,18.593 ; 11.945,18.593 ccw(c11.945,18.966) 12.21,18.702 cw(c11.945,18.966) 11.945,18.593 ; v1@17.197,18.852 cw(c17.313,18.441) 17.527,18.811 ; v1@17.197,18.852 cw(c17.313,18.441) 17.527,18.811 ; v1@17.197,18.852 cw(c17.313,18.441) 17.527,18.811 ; 17.533,14.783 cw(c17.533,14.409) 17.798,14.673 ccw(c17.533,14.409) 17.533,14.783 ; 17.533,14.783 ccw(c17.533,15.156) 17.798,14.892 cw(c17.533,15.156) 17.533,14.783 ; 17.533,18.593 cw(c17.533,18.219) 17.798,18.483 ccw(c17.533,18.219) 17.533,18.593 ; 17.533,18.593 ccw(c17.533,18.966) 17.798,18.702 cw(c17.533,18.966) 17.533,18.593 ; J5.3@2.36,15.524 cw(c3.324,14.56) 3.324,15.923 ccw(c3.324,14.56) J5.3@2.36,15.524 ; J5.3@2.36,16.302 ccw(c3.273,17.216) 3.273,15.923 cw(c3.273,17.216) J5.3@2.36,16.302 ; 5.781,15.923 ccw(c5.781,16.52) 6.203,16.098 cw(c5.781,16.52) 5.781,15.923 ; v1@6.345,16.098 ccw(c6.766,16.52) 6.766,15.923 cw(c6.766,16.52) v1@6.345,16.098 ; 6.772,15.923 ccw(c6.772,16.546) 7.212,16.106 cw(c6.772,16.546) 6.772,15.923 ; R42.2@7.163,16.261 cw(c8.098,16.261) 7.437,16.922 ccw(c8.098,16.261) R42.2@7.163,16.261 ; v1@7.211,16.872 cw(c8.901,15.182) 8.901,17.572 ccw(c8.901,15.182) v1@7.211,16.872 ; v1@7.466,16.993 cw(c7.791,16.993) 7.561,17.223 ccw(c7.791,16.993) v1@7.466,16.993 ; 7.669,17.331 ccw(c6.628,18.372) 8.101,18.372 cw(c6.628,18.372) 7.669,17.331 ; 7.723,17.384 cw(c8.901,16.206) 8.901,17.872 ccw(c8.901,16.206) 7.723,17.384 ; C31.1@8.919,17.872 cw(c8.958,16.79) 9.724,17.556 ccw(c8.958,16.79) C31.1@8.919,17.872 ; C31.1@9.401,18.358 ccw(c10.485,18.329) 9.718,17.562 cw(c10.485,18.329) C31.1@9.401,18.358 ; v1@11.679,18.497 cw(c11.91,18.265) 11.91,18.593 ccw(c11.91,18.265) v1@11.679,18.497 ; 16.828,21.044 cw(c17.996,19.877) 17.996,21.528 ccw(c17.996,19.877) 16.828,21.044 ; 16.949,19.144 ccw(c17.907,20.102) 17.907,18.748 cw(c17.907,20.102) 16.949,19.144 ; 16.956,19.137 ccw(c17.17,19.351) 17.17,19.048 cw(c17.17,19.351) 16.956,19.137 ; v1@17.19,15.006 ccw(c17.729,15.545) 17.729,14.783 cw(c17.729,15.545) v1@17.19,15.006 ; v1@17.27,18.948 ccw(c17.573,18.948) 17.359,18.734 cw(c17.573,18.948) v1@17.27,18.948 ; 17.34,21.557 cw(c17.996,20.901) 17.996,21.828 ccw(c17.996,20.901) 17.34,21.557 ; 17.461,18.632 ccw(c17.907,19.078) 17.907,18.448 cw(c17.907,19.078) 17.461,18.632
  Bottom Layer w0.508: v1(6.731,13.335) 6.731,13.691 ; 6.866,13.7 ccw(c6.536,14.077) R35.2@7.036,14.113 ; R35.2@6.867,13.748 cw(c7.336,13.478) R35.2@7.196,14 ; R35.2@7.163,14.122 6.731,13.691 ; U7.12@37.193,14.351 38.787,14.351 ; C34.2@38.838,21.513 38.838,13.512 41.841,10.508 41.841,8.18 39.943,8.18 ; 6.731,13.691 ccw(c6.912,13.51) 6.728,13.332 cw(c6.912,13.51) 6.731,13.691 ; v1@6.727,13.335 cw(c7.576,13.335) 6.976,13.935 ccw(c7.576,13.335) v1@6.727,13.335 ; v1@6.731,13.224 cw(c7.605,13.224) 7.219,14.008 ccw(c7.605,13.224) v1@6.731,13.224 ; v1@6.731,13.512 cw(c7.217,13.512) 7.174,13.996 ccw(c7.217,13.512) v1@6.731,13.512 ; 41.537,10.812 ccw(c42.069,11.344) 42.069,10.592 cw(c42.069,11.344) 41.537,10.812 ; 41.841,9.867 cw(c42.743,9.867) 42.105,10.505 ccw(c42.743,9.867) 41.841,9.867
  other v1: 40.818,8.18 7.366,16.993
BOOT0: R15.1 U4.94 | length 5.4
  Bottom Layer w0.203: U4.94@22.566,79.312 22.566,80.504 23.241,81.178 R15.1@23.241,82.296 ; 23.241,81.621 cw(c23.916,81.621) 23.439,82.098 ccw(c23.916,81.621) 23.241,81.621 ; 23.241,81.621 ccw(c22.566,81.621) 23.043,82.098 cw(c22.566,81.621) 23.241,81.621
BOOT1: R17.2 R18.2 U4.37 | length 13
  Bottom Layer w0.203: R17.2@19.355,57.15 R18.2@21.184,57.15 ; 20.066,57.201 U4.37@20.066,64.112 ; 20.029,57.15 cw(c20.029,57.825) 19.552,57.348 ccw(c20.029,57.825) 20.029,57.15 ; 20.029,57.15 ccw(c20.029,56.475) 19.552,56.952 cw(c20.029,56.475) 20.029,57.15 ; 20.509,57.15 cw(c20.509,56.475) 20.986,56.952 ccw(c20.509,56.475) 20.509,57.15 ; 20.509,57.15 ccw(c20.509,57.825) 20.986,57.348 cw(c20.509,57.825) 20.509,57.15
BUSY: U4.67 U5.8 | length 64.8
  Top Layer w0.254: v1(10.465,53.264) 10.716,53.264 ; v1@10.571,53.202 cw(c11.18,52.851) 10.998,53.53 ; 10.716,53.264 cw(c10.716,53.459) 10.562,53.339 ccw(c10.716,53.459) 10.716,53.264 ; 10.716,53.264 ccw(c10.716,53.069) 10.562,53.188 cw(c10.716,53.069) 10.716,53.264 ; 10.716,53.264 19.452,62 19.452,71.073 16.789,73.736 ; 16.789,73.736 cw(c16.898,73.845) 16.767,73.926 ccw(c16.898,73.845) 16.789,73.736 ; v1@10.465,53.387 ccw(c10.465,54.29) 11.104,53.651 cw(c10.465,54.29) v1@10.465,53.387 ; v1@16.785,73.99 ccw(c17.389,73.99) 16.962,73.563 cw(c17.389,73.99) v1@16.785,73.99
  Bottom Layer w0.25: U4.67@11.966,73.712 16.384,73.712 v1(16.662,73.99) ; 16.449,73.777 cw(c16.662,73.563) 16.662,73.865 ccw(c16.662,73.563) 16.449,73.777 ; 16.449,73.777 ccw(c16.236,73.99) 16.537,73.99 cw(c16.236,73.99) 16.449,73.777
  Bottom Layer w0.254: U5.8@-3.124,45.136 -2.877,44.889 4.681,44.889 10.465,50.673 v1(10.465,53.264) ; 10.465,52.967 cw(c10.762,52.967) 10.552,53.177 ccw(c10.762,52.967) 10.465,52.967 ; 10.465,52.967 ccw(c10.168,52.967) 10.378,53.177 cw(c10.168,52.967) 10.465,52.967 ; U5.8@-2.881,45.252 ccw(c-2.003,46.13) -2.003,44.889 cw(c-2.003,46.13) U5.8@-2.881,45.252 ; U5.8@-2.701,45.432 ccw(c-1.39,46.743) -1.39,44.889 cw(c-1.39,46.743) U5.8@-2.701,45.432 ; U5.8@-2.521,44.66 cw(c-1.968,44.107) -1.968,44.889 ccw(c-1.968,44.107) U5.8@-2.521,44.66 ; U5.8@-2.521,45.612 ccw(c-0.777,47.356) -0.777,44.889 cw(c-0.777,47.356) U5.8@-2.521,45.612
CH340_RXD: U3.3 U4.25 | length 38.5
  Top Layer w0.203: v1(20.726,83.363) 20.748,83.341 20.748,80.928 21.895,79.781 v1(21.895,76.454) ; v1@23.981,69.111 ccw(c24.29,69.29) 24.198,68.945 ; v1@24.232,69.139 25.349,68.021 v1(25.349,65.684) ; 21.895,76.812 cw(c21.537,76.812) 21.79,76.559 ccw(c21.537,76.812) 21.895,76.812 ; 21.895,76.812 ccw(c22.253,76.812) 22,76.559 cw(c22.253,76.812) 21.895,76.812 ; 25.349,66.043 cw(c24.991,66.043) 25.244,65.789 ccw(c24.991,66.043) 25.349,66.043 ; 25.349,66.043 ccw(c25.707,66.043) 25.454,65.789 cw(c25.707,66.043) 25.349,66.043 ; v1@20.621,83.258 cw(c20.316,82.953) 20.748,82.953 ccw(c20.316,82.953) v1@20.621,83.258 ; 20.748,83.056 cw(c21.033,83.056) 20.831,83.258 ccw(c21.033,83.056) 20.748,83.056 ; v1@24.028,68.99 cw(c24.028,68.142) 24.629,68.742 ccw(c24.028,68.142) v1@24.028,68.99 ; v1@24.028,69.194 cw(c24.028,68.835) 24.282,69.089 ccw(c24.028,68.835) v1@24.028,69.194
  Bottom Layer w0.203: v1@20.703,83.509 ccw(c20.659,83.783) 20.899,83.644 ccw(c21.169,83.488) v1@20.869,83.403 ; 20.85,83.64 cw(c21.119,83.672) U3.3@21.014,83.921 ; v1@20.855,83.568 ccw(c20.742,83.681) U3.3@20.862,83.787 ; v1@20.874,83.379 cw(c21.172,83.411) U3.3@21.038,83.679 ; v1@20.875,83.364 cw(c21.226,83.366) 20.976,83.612 ; 20.976,83.612 cw(c20.729,83.862) 20.727,83.511 ccw(c20.729,83.864) 20.98,83.616 ; U3.3@21.014,84.696 21.014,83.651 v1(20.726,83.363) ; v1@21.895,76.556 v1(21.895,76.454) 21.895,76.352 23.524,74.723 23.524,69.646 24.028,69.142 v1(24.028,69.139) ; v1(25.349,65.684) 25.377,65.712 U4.25@27.166,65.712 ; v1@20.697,83.508 ccw(c20.59,84.027) U3.3@21.049,83.762 ; v1@20.697,83.508 ccw(c20.59,84.027) U3.3@21.049,83.762 ; v1@20.697,83.508 ccw(c20.59,84.027) U3.3@21.049,83.762 ; v1(20.726,83.363) ccw(c20.409,83.68) 20.826,83.846 cw(c20.409,83.68) v1(20.726,83.363) ; v1@20.875,83.363 cw(c21.233,83.363) 20.98,83.616 ; v1@20.875,83.363 cw(c21.228,83.365) 20.98,83.616 ; v1@20.875,83.363 cw(c21.233,83.363) 20.98,83.616 ; 20.98,83.616 cw(c20.726,83.869) 20.726,83.511 ccw(c20.726,83.869) 20.98,83.616 ; U3.3@21.014,83.921 cw(c20.721,83.804) 20.944,83.581 ccw(c20.721,83.804) U3.3@21.014,83.921 ; v1@22.043,76.454 ccw(c22.647,76.454) 22.22,76.027 cw(c22.647,76.454) v1@22.043,76.454 ; 23.773,69.397 cw(c23.515,69.139) 23.88,69.139 ccw(c23.515,69.139) 23.773,69.397 ; 23.78,69.39 ccw(c24.028,69.639) 24.028,69.287 cw(c24.028,69.639) 23.78,69.39 ; v1@25.454,65.579 cw(c25.775,65.259) 25.775,65.712 ccw(c25.775,65.259) v1@25.454,65.579 ; v1@25.454,65.789 ccw(c25.64,65.976) 25.64,65.712 cw(c25.64,65.976) v1@25.454,65.789
CH340_TXD: U3.2 U4.26 | length 45.3
  Top Layer w0.203: v1(22.504,83.312) 22.729,83.087 ; v1@22.506,83.164 cw(c22.508,82.916) 22.723,83.04 ; v1@22.637,83.245 ccw(c23.077,83.021) 22.649,82.774 ; v1(22.657,76.479) 22.729,76.552 22.729,83.087 ; v1(24.079,69.875) 24.384,69.875 ; v1(26.162,64.922) 26.162,68.097 24.384,69.875 ; 22.729,83.087 cw(c22.917,83.275) 22.652,83.299 ccw(c22.917,83.275) 22.729,83.087 ; 22.729,83.087 ccw(c22.541,82.9) 22.518,83.164 cw(c22.541,82.9) 22.729,83.087 ; 24.384,69.875 cw(c24.384,70.114) 24.196,69.967 ccw(c24.384,70.114) 24.384,69.875 ; 24.384,69.875 ccw(c24.384,69.637) 24.196,69.784 cw(c24.384,69.637) 24.384,69.875 ; 26.162,65.281 cw(c25.804,65.281) 26.057,65.027 ccw(c25.804,65.281) 26.162,65.281 ; 26.162,65.281 ccw(c26.52,65.281) 26.267,65.027 cw(c26.52,65.281) 26.162,65.281 ; v1@22.399,83.207 cw(c21.604,82.412) 22.729,82.412 ccw(c21.604,82.412) v1@22.399,83.207 ; v1@22.543,83.351 cw(c22.094,82.902) 22.729,82.902 ccw(c22.094,82.902) v1@22.543,83.351 ; v1@22.552,76.584 ccw(c22.124,77.012) 22.729,77.012 cw(c22.124,77.012) v1@22.552,76.584 ; v1@24.079,69.727 cw(c24.079,68.633) 24.853,69.407 ccw(c24.079,68.633) v1@24.079,69.727 ; v1@24.079,69.93 cw(c24.079,69.327) 24.506,69.753 ccw(c24.079,69.327) v1@24.079,69.93
  Bottom Layer w0.203: U3.2@22.183,83.746 cw(c22.031,83.482) 22.325,83.561 ; U3.2@22.26,83.672 ccw(c22.663,83.905) v1@22.543,83.455 ; U3.2@22.284,84.696 22.284,83.532 ; 22.336,83.541 cw(c22.118,83.415) v1@22.361,83.35 ; v1@22.343,83.493 cw(c22.616,83.566) U3.2@22.423,83.773 ; U3.2@22.343,83.639 ccw(c22.522,83.639) v1@22.512,83.46 ; U3.2@22.364,83.842 cw(c21.949,83.603) v1@22.373,83.381 ; v1(22.657,76.479) 22.657,76.581 24.079,75.159 v1(24.079,69.875) ; U4.26@25.566,64.112 25.566,64.327 v1(26.162,64.922) ; v1@26.014,64.922 cw(c25.655,64.922) 25.909,64.669 cw(c26.162,64.416) v1@26.162,64.774 ; U3.2@22.221,83.675 ccw(c22.607,83.898) v1@22.53,83.458 ; U3.2@22.221,83.675 ccw(c22.607,83.898) v1@22.53,83.458 ; U3.2@22.221,83.675 ccw(c22.607,83.898) v1@22.53,83.458 ; 22.284,83.532 cw(c22.556,83.532) 22.401,83.755 ccw(c22.556,83.532) 22.284,83.532 ; 22.284,83.532 ccw(c22.013,83.532) 22.168,83.755 cw(c22.013,83.532) 22.284,83.532 ; 22.284,83.532 v1(22.504,83.312) ; 22.296,83.489 ccw(c22.641,83.582) v1@22.48,83.263 ; 22.296,83.489 ccw(c22.641,83.582) v1@22.48,83.263 ; 22.296,83.489 ccw(c22.641,83.582) v1@22.48,83.263 ; v1(22.504,83.312) cw(c22.784,83.592) 22.454,83.81 ccw(c22.784,83.592) v1(22.504,83.312) ; 24.079,70.234 cw(c23.721,70.234) 23.974,69.98 ccw(c23.721,70.234) 24.079,70.234 ; 24.079,70.234 ccw(c24.437,70.234) 24.184,69.98 cw(c24.437,70.234) 24.079,70.234 ; U3.2@22.284,83.711 ccw(c22.903,83.711) 22.466,83.273 cw(c22.903,83.711) U3.2@22.284,83.711 ; U3.2@22.284,83.921 ccw(c22.572,83.732) 22.328,83.488 cw(c22.572,83.732) U3.2@22.284,83.921 ; U3.2@22.284,84.201 ccw(c23.394,84.201) 22.609,83.417 cw(c23.394,84.201) U3.2@22.284,84.201 ; v1@22.657,76.331 cw(c22.657,75.727) 23.084,76.154 ccw(c22.657,75.727) v1@22.657,76.331
D+: J2.3 L2.2 | length 24.9
  Top Layer w0.25: v1(29.185,86.411) 35.941,86.411 38.786,83.566 v1(42.139,83.566) ; 29.486,86.411 cw(c29.486,86.713) 29.273,86.499 ccw(c29.486,86.713) 29.486,86.411 ; 29.486,86.411 ccw(c29.486,86.109) 29.273,86.322 cw(c29.486,86.109) 29.486,86.411 ; 41.837,83.566 cw(c41.837,83.264) 42.05,83.478 ccw(c41.837,83.264) 41.837,83.566 ; 41.837,83.566 ccw(c41.837,83.868) 42.05,83.654 cw(c41.837,83.868) 41.837,83.566
  Bottom Layer w0.25: L2.2@28.359,86.443 29.153,86.443 v1(29.185,86.411) ; v1@42.164,83.591 42.499,83.256 J2.3@45.629,83.256 ; 28.799,86.357 cw(c28.901,85.979) v1@29.116,86.306 ; 28.799,86.357 cw(c28.901,85.979) v1@29.116,86.306 ; 28.799,86.357 cw(c28.901,85.979) v1@29.116,86.306 ; L2.2@28.553,86.209 cw(c29.117,85.646) 29.117,86.443 ccw(c29.117,85.646) L2.2@28.553,86.209 ; L2.2@28.553,86.598 ccw(c28.929,86.974) 28.929,86.443 cw(c28.929,86.974) L2.2@28.553,86.598 ; 28.806,86.443 cw(c28.806,86.032) 29.096,86.322 ccw(c28.806,86.032) 28.806,86.443 ; v1@42.139,83.441 cw(c42.139,83.017) 42.439,83.317 ccw(c42.139,83.017) v1@42.139,83.441
D-: J2.4 L1.2 | length 26.4
  Top Layer w0.25: v1(29.185,87.884) 30.205,86.864 36.129,86.864 38.639,84.353 v1(42.774,84.353) ; 29.398,87.671 cw(c29.611,87.884) 29.31,87.884 ccw(c29.611,87.884) 29.398,87.671 ; 29.398,87.671 ccw(c29.185,87.457) 29.185,87.759 cw(c29.185,87.457) 29.398,87.671 ; 42.472,84.353 cw(c42.472,84.052) 42.685,84.265 ccw(c42.472,84.052) 42.472,84.353 ; 42.472,84.353 ccw(c42.472,84.655) 42.685,84.442 cw(c42.472,84.655) 42.472,84.353
  Bottom Layer w0.25: L1.2@28.359,87.954 29.115,87.954 v1(29.185,87.884) ; v1@42.774,84.379 43.246,83.906 J2.4@45.629,83.906 ; 28.84,88.003 cw(c28.739,87.627) v1@29.076,87.821 ; 28.84,88.003 cw(c28.739,87.627) v1@29.076,87.821 ; 28.84,88.003 cw(c28.739,87.627) v1@29.076,87.821 ; 28.874,87.914 cw(c28.919,87.745) v1@29.074,87.826 ; 28.874,87.914 cw(c28.919,87.745) v1@29.074,87.826 ; 28.874,87.914 cw(c28.919,87.745) v1@29.074,87.826 ; v1@29.023,87.954 cw(c29.023,88.618) 28.553,88.148 ccw(c29.023,88.618) v1@29.023,87.954 ; v1@29.023,87.954 ccw(c29.023,87.29) 28.553,87.759 cw(c29.023,87.29) v1@29.023,87.954 ; L1.2@28.714,87.954 cw(c28.714,87.414) 29.096,87.796 ccw(c28.714,87.414) L1.2@28.714,87.954 ; v1@42.774,84.228 cw(c42.774,83.865) 43.03,84.122 ccw(c42.774,83.865) v1@42.774,84.228 ; v1@42.899,84.353 ccw(c43.139,84.353) 42.969,84.183 cw(c43.139,84.353) v1@42.899,84.353
DAC: U4.29
DATA: U4.68 U5.7 | length 63.5
  Top Layer w0.254: v1(11.481,53.061) 19.91,61.489 19.91,71.632 v1(17.45,74.092) ; 11.691,53.271 cw(c11.481,53.481) 11.481,53.184 ccw(c11.481,53.481) 11.691,53.271 ; 11.691,53.271 ccw(c11.901,53.061) 11.604,53.061 cw(c11.901,53.061) 11.691,53.271 ; 17.66,73.882 cw(c17.87,74.092) 17.573,74.092 ccw(c17.87,74.092) 17.66,73.882 ; 17.66,73.882 ccw(c17.45,73.672) 17.45,73.969 cw(c17.45,73.672) 17.66,73.882
  Bottom Layer w0.25: U4.68@11.966,74.212 16.067,74.212 16.423,74.568 16.973,74.568 v1(17.45,74.092) ; 17.236,74.305 cw(c17.023,74.092) 17.325,74.092 ccw(c17.023,74.092) 17.236,74.305 ; 17.236,74.305 ccw(c17.45,74.519) 17.45,74.217 cw(c17.45,74.519) 17.236,74.305
  Bottom Layer w0.254: U5.7@-3.124,42.596 3.034,42.596 11.481,51.042 v1(11.481,53.061) ; -1.986,42.596 cw(c-1.986,43.607) -2.701,42.892 ccw(c-1.986,43.607) -1.986,42.596 ; -1.986,42.596 ccw(c-1.986,41.584) -2.701,42.3 cw(c-1.986,41.584) -1.986,42.596 ; -1.372,42.596 cw(c-1.372,44.221) -2.521,43.072 ccw(c-1.372,44.221) -1.372,42.596 ; -1.372,42.596 ccw(c-1.372,40.971) -2.521,42.12 cw(c-1.372,40.971) -1.372,42.596 ; 11.481,52.764 cw(c11.778,52.764) 11.568,52.974 ccw(c11.778,52.764) 11.481,52.764 ; 11.481,52.764 ccw(c11.184,52.764) 11.394,52.974 cw(c11.184,52.764) 11.481,52.764
DB0: J1.1 U4.61 | length 28.9
  Top Layer w0.25: v1(3.378,85.471) 3.424,85.425 J1.1@6.807,85.425 ; v1@3.467,85.559 ccw(c3.791,85.883) 3.791,85.425 cw(c3.791,85.883) v1@3.467,85.559
  Bottom Layer w0.25: v1(3.378,85.471) 2.599,84.692 2.599,71.849 3.735,70.712 U4.61@11.966,70.712 ; 3.165,85.258 cw(c3.378,85.044) 3.378,85.346 ccw(c3.378,85.044) 3.165,85.258 ; 3.165,85.258 ccw(c2.951,85.471) 3.253,85.471 cw(c2.951,85.471) 3.165,85.258
DB1: J1.2 U4.62 | length 27
  Top Layer w0.25: v1(3.683,84.684) 3.741,84.625 J1.2@6.807,84.625 ; v1@3.771,84.772 ccw(c4.126,85.126) 4.126,84.625 cw(c4.126,85.126) v1@3.771,84.772
  Bottom Layer w0.25: v1(3.683,84.684) 3.052,84.053 3.052,72.179 4.019,71.212 U4.62@11.966,71.212 ; 3.47,84.47 cw(c3.683,84.257) 3.683,84.559 ccw(c3.683,84.257) 3.47,84.47 ; 3.47,84.47 ccw(c3.256,84.684) 3.558,84.684 cw(c3.256,84.684) 3.47,84.47
DB2: J1.3 U4.81 | length 14.1
  Top Layer w0.25: J1.3@6.807,83.825 13.203,83.825 v1@13.259,83.769 ; 13.098,83.771 ccw(c13.167,83.89) v1@13.282,83.813 ; 12.888,83.825 cw(c12.888,83.246) 13.297,83.655 ccw(c12.888,83.246) 12.888,83.825
  Bottom Layer w0.25: v1(13.386,83.744) 16.066,81.063 U4.81@16.066,79.312 ; 13.599,83.53 cw(c13.813,83.744) 13.511,83.744 ccw(c13.813,83.744) 13.599,83.53 ; 13.599,83.53 ccw(c13.386,83.317) 13.386,83.619 cw(c13.386,83.317) 13.599,83.53
DB3: J1.4 U4.82 | length 16.4
  Top Layer w0.25: J1.4@6.807,83.025 16.289,83.025 v1(16.408,82.906) ; 16.062,82.966 ccw(c16.172,83.156) v1@16.323,82.997 ; 15.818,83.025 cw(c15.818,82.315) 16.32,82.817 ccw(c15.818,82.315) 15.818,83.025
  Bottom Layer w0.25: v1(16.408,82.906) 16.566,82.748 U4.82@16.566,79.312 ; 16.503,82.501 cw(c16.78,82.661) v1@16.513,82.837 ; v1@16.32,82.817 cw(c15.726,82.223) 16.566,82.223 ccw(c15.726,82.223) v1@16.32,82.817
DB4: J1.22 U4.38 | length 20.6
  Top Layer w0.25: J1.22@6.807,68.625 12.009,68.625 13.335,69.952 17.247,69.952 v1(18.059,69.139) ; 17.846,69.352 cw(c17.633,69.139) 17.934,69.139 ccw(c17.633,69.139) 17.846,69.352 ; 17.846,69.352 ccw(c18.059,69.566) 18.059,69.264 cw(c18.059,69.566) 17.846,69.352
  Bottom Layer w0.25: v1(18.059,69.139) 18.237,68.961 18.237,66.599 19.566,65.27 U4.38@19.566,64.112 ; v1@18.169,69.078 ccw(c18.5,68.893) 18.171,68.703 ; v1@17.971,69.05 cw(c17.328,68.408) 18.237,68.408 ccw(c17.328,68.408) v1@17.971,69.05